# EAGLE board rgbstripcontroller-main (EAGLE 8.3.2)
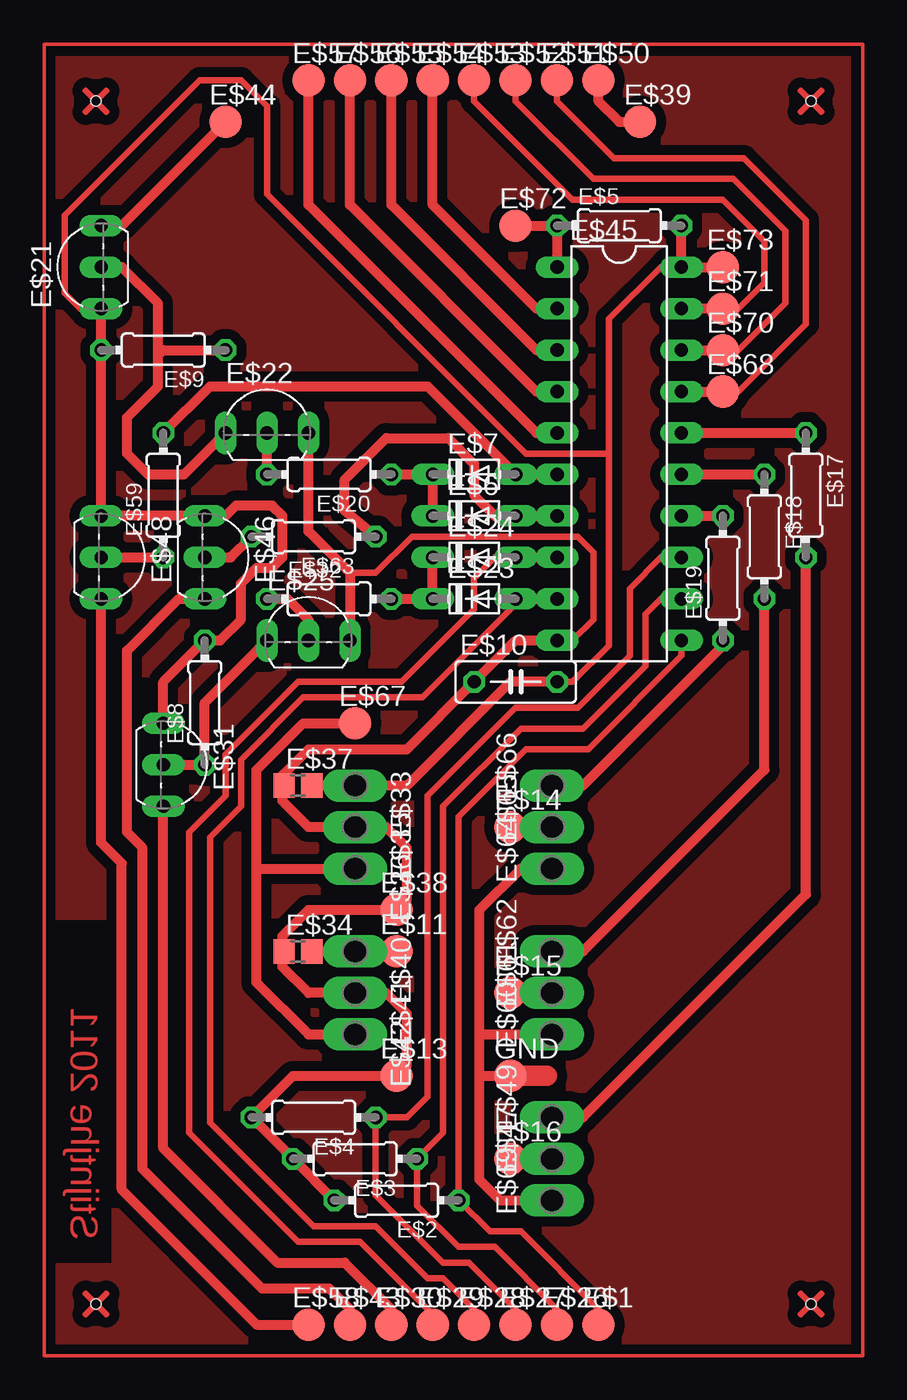
[diagram p0: board, top side]

No outline drawn. Coordinates in mm, seen from the top.
Copper layers (1*16): Top 0.035mm / dielectric 1.5mm / Bottom 0.035mm
Design rules "default": minimum track width 10mil, minimum drill 24mil, track to track 8mil, track to pad 8mil, pad to pad 8mil, via to via 8mil, smd to smd 8mil, copper to edge 40mil, drill to drill 8mil, minimum pad ring 10mil, minimum via ring 8mil, stop-mask expansion 4mil, vias tented up to drill 0mil, thermal gap 10mil
Holes 0.6 mm at 3.17,76.83 46.99,76.83 46.99,3.17 3.17,3.17

## Footprints (pad centres in the part's own frame; a part is rotated, then mirrored left to right if it is on the bottom)
TP20R = smd 2 x 2: TP 0,0
0204/7 = drill 0.813 octagon: 1 -3.81,0; 2 3.81,0
DO34-5 = drill 0.813 long: A 2.54,0; C -2.54,0
C050-025X075 = drill 0.813 octagon: 1 -2.54,0; 2 2.54,0
TO92-CBE = drill 0.813 long: B 0,0; C 2.54,0; E -2.54,0
TO92-BEC = drill 0.813 long: B -2.54,0; C 2.54,0; E 0,0
P1-13Y = drill 1.321 pad 1.905 long: TP 0,0
R0805 = smd 1.3 x 1.5: 1 -0.85,0; 2 0.85,0
DIL20 = drill 0.813 long: 1 -11.43,-3.81; 2 -8.89,-3.81; 3 -6.35,-3.81; 4 -3.81,-3.81; 5 -1.27,-3.81; 6 1.27,-3.81; 7 3.81,-3.81; 8 6.35,-3.81; 9 8.89,-3.81; 10 11.43,-3.81; 11 11.43,3.81; 12 8.89,3.81; 13 6.35,3.81; 14 3.81,3.81; 15 1.27,3.81; 16 -1.27,3.81; 17 -3.81,3.81; 18 -6.35,3.81; 19 -8.89,3.81; 20 -11.43,3.81

## Placement (x,y rotation side)
E$1  [TP20R]  33.97,1.91 0 top
E$2  [0204/7]  21.59,9.53 180 top
E$3  [0204/7]  19.05,12.06 180 top
E$4  [0204/7]  16.51,14.61 180 top
E$5  [0204/7]  35.24,69.22 0 top
E$6  [DO34-5]  26.35,51.44 0 top
E$7  [DO34-5]  26.35,53.98 0 top
E$8  [0204/7]  9.84,40.01 90 top
E$9  [0204/7]  7.3,61.59 180 top
E$10  [C050-025X075]  28.89,41.27 0 top
E$11  [TP20R]  21.59,24.77 0 top
E$13  [TP20R]  21.59,17.14 0 top
E$14  [TP20R]  28.57,32.38 0 top
E$15  [TP20R]  28.57,22.23 0 top
E$16  [TP20R]  28.57,12.06 0 top
E$17  [0204/7]  46.67,52.7 270 top
E$18  [0204/7]  44.13,50.16 270 top
E$19  [0204/7]  41.59,47.62 90 top
E$20  [0204/7]  17.46,53.98 180 top
E$21  [TO92-CBE]  3.49,66.67 90 top
E$22  [TO92-CBE]  13.65,56.52 0 top
E$23  [DO34-5]  26.35,46.35 0 top
E$24  [DO34-5]  26.35,48.9 0 top
E$25  [TO92-BEC]  16.19,43.81 0 top
E$26  [TP20R]  31.43,1.91 0 top
E$27  [TP20R]  28.89,1.91 0 top
E$28  [TP20R]  26.35,1.91 0 top
E$29  [TP20R]  23.81,1.91 0 top
E$30  [TP20R]  21.27,1.91 0 top
E$31  [TO92-BEC]  7.3,36.2 270 top
E$32  [0204/7]  17.46,46.35 0 top
E$33  [P1-13Y]  19.05,34.92 270 top
E$34  [R0805]  15.56,24.77 0 top
E$35  [P1-13Y]  19.05,32.38 270 top
E$36  [P1-13Y]  19.05,29.84 270 top
E$37  [R0805]  15.56,34.92 0 top
E$38  [TP20R]  21.59,27.3 0 top
E$39  [TP20R]  36.51,75.56 0 top
E$40  [P1-13Y]  19.05,24.77 270 top
E$41  [P1-13Y]  19.05,22.23 270 top
E$42  [P1-13Y]  19.05,19.68 270 top
E$43  [TP20R]  18.73,1.91 0 top
E$44  [TP20R]  11.11,75.56 0 top
E$45  [DIL20]  35.24,55.24 270 top
E$46  [TO92-CBE]  9.84,48.9 270 top
E$47  [P1-13Y]  31.11,12.06 90 top
E$48  [TO92-CBE]  3.49,48.9 270 top
E$49  [P1-13Y]  31.11,14.61 90 top
E$50  [TP20R]  33.97,78.11 0 top
E$51  [TP20R]  31.43,78.11 0 top
E$52  [TP20R]  28.89,78.11 0 top
E$53  [TP20R]  26.35,78.11 0 top
E$54  [TP20R]  23.81,78.11 0 top
E$55  [TP20R]  21.27,78.11 0 top
E$56  [TP20R]  18.73,78.11 0 top
E$57  [TP20R]  16.19,78.11 0 top
E$58  [TP20R]  16.19,1.91 0 top
E$59  [0204/7]  7.3,52.7 90 top
E$60  [P1-13Y]  31.11,19.68 90 top
E$61  [P1-13Y]  31.11,22.23 90 top
E$62  [P1-13Y]  31.11,24.77 90 top
E$63  [0204/7]  16.51,50.16 180 top
E$64  [P1-13Y]  31.11,29.84 90 top
E$65  [P1-13Y]  31.11,32.38 90 top
E$66  [P1-13Y]  31.11,34.92 90 top
E$67  [TP20R]  19.05,38.73 0 top
E$68  [TP20R]  41.59,59.05 0 top
E$69  [P1-13Y]  31.11,9.53 90 top
E$70  [TP20R]  41.59,61.59 0 top
E$71  [TP20R]  41.59,64.14 0 top
E$72  [TP20R]  28.89,69.22 0 top
E$73  [TP20R]  41.59,66.67 0 top
GND  [TP20R]  28.57,17.14 0 top

## Library data of the parts
E$1 E$11 E$13-E$16 E$26-E$30 E$33 E$35 E$36 E$38-E$44 E$47 E$49-E$58 E$60-E$62 E$64-E$73 GND = testpad
E$2-E$5 E$8-E$10 E$17-E$20 E$32 E$34 E$37 E$59 E$63 = resistor
E$6 E$7 E$23 E$24 = diode
E$21 E$22 E$25 E$31 E$46 E$48 = transistor-npn
E$45 = ic-package

## Nets
S$1: E$5.1 E$45.1 E$72.TP
S$2: E$60.TP E$64.TP E$69.TP GND.TP
S$3: E$36.TP E$42.TP E$67.TP
S$4: E$19.1 E$66.TP
S$5: E$3.1 E$26.TP E$45.12
S$6: E$23.A E$28.TP E$45.9
S$7: E$4.1 E$27.TP E$45.13
S$10: E$6.C E$7.C E$20.1
S$11: E$20.2 E$22.B
S$12: E$1.TP E$2.1 E$45.11
S$13: E$23.C E$24.C E$32.2
S$14: E$2.2 E$3.2 E$4.2 E$10.1 E$22.C E$25.C E$35.TP E$41.TP E$45.10
S$15: E$17.1 E$45.16
S$16: E$39.TP E$50.TP
S$17: E$11.TP E$34.2 E$40.TP
S$18: E$30.TP E$31.C
S$19: E$5.2 E$8.2 E$9.2 E$10.2 E$21.E E$31.B E$33.TP E$37.2 E$45.20 E$46.E E$48.E E$73.TP
S$20: E$21.C E$44.TP
S$21: E$24.A E$29.TP E$45.8
S$22: E$46.B E$63.2
S$23: E$45.19 E$53.TP E$71.TP
S$27: E$9.1 E$21.B E$22.E
S$29: E$45.18 E$52.TP E$70.TP
S$41: E$8.1 E$25.B E$31.E
S$42: E$25.E E$32.1
S$43: E$45.17 E$51.TP E$68.TP
S$45: E$7.A E$45.6 E$59.2
S$46: E$6.A E$45.7 E$63.1
S$47: E$19.2 E$45.14
S$48: E$16.TP E$47.TP
S$49: E$15.TP E$61.TP
S$50: E$14.TP E$65.TP
S$51: E$18.1 E$45.15
S$52: E$48.B E$59.1
S$53: E$18.2 E$62.TP
S$54: E$45.2 E$54.TP
S$55: E$45.3 E$55.TP
S$56: E$45.4 E$56.TP
S$57: E$45.5 E$57.TP
S$58: E$17.2 E$49.TP
S$59: E$48.C E$58.TP
S$60: E$43.TP E$46.C

## Tracks (layer width: path | path; a pad name or v marks a point on that pad's centre or on a via)
POLYGON
  pour Top (isolate 0.61): 50.16,80.33 50.16,0 0,0 0,5.4 4.45,5.4 4.45,26.99 0,26.99 0,80.33
S$1
  Top 0.61: E$45.1 E$5.1 E$72.TP
S$2
  Top 0.61: E$64.TP 29.21,29.84 26.67,27.3 26.67,19.68 | 26.67,19.68 E$60.TP | E$69.TP 27.94,9.53 26.67,10.79 26.67,17.14 | 26.67,17.14 26.67,19.68 | 26.67,17.14 GND.TP
  Top 1.27: GND.TP 30.8,17.14
S$3
  Top 0.61: 13.02,29.84 E$36.TP | 13.02,29.84 13.02,22.86 16.19,19.68 E$42.TP | E$67.TP 15.88,38.73 13.02,35.88 13.02,29.84
S$4
  Top 0.61: E$19.1 41.59,43.5 33.02,34.92 E$66.TP
S$5
  Top 0.406: E$45.12 37.78,46.35 36.83,45.4 36.83,42.23 33.02,38.42 29.21,38.42 24.45,33.66 24.45,13.65 E$3.1 22.86,9.21 25.4,6.67 27.62,6.67 31.43,2.86 E$26.TP
S$6
  Top 0.406: E$23.A 28.89,46.04 23.18,40.32 15.88,40.32 12.06,36.51 12.06,33.66 10.16,31.75 10.16,14.29 16.51,7.94 20.32,7.94 23.5,4.76 24.45,4.76 26.35,2.86 E$28.TP
  Top 0.61: E$23.A E$45.9
S$7
  Top 0.406: E$45.13 37.78,48.9 35.88,46.99 35.88,42.86 32.7,39.69 28.89,39.69 23.5,34.29 23.5,15.88 22.23,14.61 E$4.1 20.32,9.84 24.45,5.71 26.04,5.71 28.89,2.86 E$27.TP
S$8
  Top 0.61: 21.27,1.91 21.27,2.54
S$9
  Top 0.61: 28.89,1.91 28.89,2.54
S$10
  Top 0.61: E$6.C E$7.C E$20.1
S$11
  Top 0.61: E$20.2 E$22.B
S$12
  Top 0.406: E$45.11 39.05,42.86 33.34,37.15 29.53,37.15 25.4,33.02 E$2.1 27.3,7.62 29.21,7.62 33.97,2.86 E$1.TP
S$13
  Top 0.61: E$24.C E$23.C E$32.2
S$14
  Top 0.406: E$45.10 32.38,43.81 33.66,45.09 33.66,49.21 32.7,50.16 22.54,50.16 20.32,47.94 18.73,47.94
  Top 0.61: E$22.C 16.19,50.48 18.73,47.94 E$25.C | E$45.10 28.89,43.81 E$10.1 22.23,37.15 16.19,37.15 14.61,35.56 14.61,33.97 16.19,32.38 E$35.TP 20.95,32.38 22.23,31.11 22.23,27.94 21.59,27.3 16.19,27.3 14.61,25.72 14.61,23.81 16.19,22.23 E$41.TP 20.95,22.23 22.23,20.95 22.23,17.78 21.59,17.14 15.24,17.14 E$4.2 E$3.2 E$2.2
S$15
  Top 0.61: E$45.16 E$17.1
S$16
  Top 0.61: E$50.TP 33.97,76.83 35.24,75.56 E$39.TP
S$17
  Top 0.61: E$11.TP E$40.TP E$34.2
S$18
  Top 0.61: E$31.C 7.3,12.7 14.29,5.71 18.41,5.71 21.27,2.86 E$30.TP
S$19
  Top 0.406: E$45.20 37.78,66.67 34.61,63.5 34.61,55.24 | 34.61,55.24 34.61,43.5 32.38,41.27 E$10.2 | E$21.E 2.22,64.14 1.27,65.09 1.27,69.85 9.53,78.11 12.06,78.11 13.65,76.52 13.65,71.12 29.53,55.24 34.61,55.24
  Top 0.61: E$31.B 7.3,41.27 E$8.2 10.79,43.81 12.06,45.09 12.06,47.31 13.02,48.26 13.97,48.26 14.61,48.9 14.61,51.44 13.97,52.07 11.75,52.07 11.11,51.44 E$46.E E$48.E E$9.2 E$21.E | E$5.2 E$45.20 E$73.TP | E$10.2 28.57,41.27 22.23,34.92 E$33.TP E$37.2
S$20
  Top 0.61: E$21.C 4.76,69.22 E$44.TP
S$21
  Top 0.406: E$29.TP 23.81,2.54 19.37,6.99 15.56,6.99 8.89,13.65 8.89,32.07 11.11,34.29 11.11,36.83 15.56,41.27 21.91,41.27 26.35,45.72 26.35,47.62 27.62,48.9 E$24.A
  Top 0.61: E$24.A E$45.8
S$22
  Top 0.61: E$46.B 11.43,48.9 E$63.2
S$23
  Top 0.406: E$45.19 40.32,64.14 | E$53.TP 26.35,76.83 32.38,70.8 41.59,70.8 44.13,68.26 44.13,65.72 42.55,64.14 E$71.TP
  Top 0.61: E$71.TP E$45.19
S$27
  Top 0.61: E$22.E 8.57,53.98 6.35,53.98 5.08,55.24 5.08,57.47 6.99,59.37 6.99,61.28 | E$21.B 4.76,66.67 6.99,64.45 6.99,61.28 | E$9.1 7.3,61.59 6.99,61.28
S$29
  Top 0.406: E$52.TP 28.89,76.83 33.66,72.07 42.23,72.07 45.4,68.9 45.4,64.45 42.55,61.59 E$70.TP | E$45.18 40.32,61.59
  Top 0.61: E$45.18 E$70.TP
S$32
  Top 0.406: 3.81,77.47 2.54,76.2
S$33
  Top 0.406: 3.81,76.2 2.54,77.47
S$34
  Top 0.406: 46.35,77.47 47.62,76.2
S$35
  Top 0.406: 47.62,77.47 46.35,76.2
S$36
  Top 0.406: 46.35,2.54 47.62,3.81
S$37
  Top 0.406: 46.35,3.81 47.62,2.54
S$38
  Top 0.406: 2.54,2.54 3.81,3.81
S$39
  Top 0.406: 3.81,2.54 2.54,3.81
S$41
  Top 0.61: E$31.E E$8.1 9.84,40.01 E$25.B
S$42
  Top 0.61: E$32.1 14.92,46.35 16.19,45.09 E$25.E
S$43
  Top 0.406: E$51.TP 31.43,76.83 34.92,73.34 42.86,73.34 46.67,69.53 46.67,63.18 42.55,59.05 E$68.TP | E$45.17 40.32,59.05
  Top 0.61: E$45.17 E$68.TP
S$44
  Top 0.203: 50.16,0 50.16,80.33 0,80.33 0,0 50.16,0
S$45
  Top 0.61: E$45.6 E$7.A 23.5,59.37 10.16,59.37 E$59.2
S$46
  Top 0.61: E$45.7 E$6.A 27.62,51.44 26.35,52.7 26.35,54.61 24.77,56.2 20.95,56.2 18.41,53.66 18.41,51.75 E$63.1
S$47
  Top 0.61: E$45.14 E$19.2
S$48
  Top 0.61: E$16.TP E$47.TP
S$49
  Top 0.61: E$15.TP E$61.TP
S$50
  Top 0.61: E$14.TP E$65.TP
S$51
  Top 0.61: E$45.15 E$18.1
S$52
  Top 0.61: E$48.B E$59.1
S$53
  Top 0.61: E$62.TP 33.02,24.77 44.13,35.88 E$18.2
S$54
  Top 0.61: E$54.TP 23.81,70.48 30.16,64.14 E$45.2
S$55
  Top 0.61: E$55.TP 21.27,70.48 30.16,61.59 E$45.3
S$56
  Top 0.61: E$56.TP 18.73,70.48 30.16,59.05 E$45.4
S$57
  Top 0.61: E$57.TP 16.19,70.48 30.16,56.52 E$45.5
S$58
  Top 0.61: E$49.TP 33.02,14.61 46.67,28.26 E$17.2
S$59
  Top 0.61: E$48.C 3.49,31.43 4.76,30.16 4.76,10.16 13.02,1.91 E$58.TP
S$60
  Top 0.61: E$46.C 8.26,46.35 5.08,43.18 5.08,32.07 6.03,31.11 6.03,11.43 13.34,4.13 17.46,4.13 18.73,2.86 E$43.TP

## Text on the board
Top: Stijntjhe 2011